# Altium PCB wifi_can.PcbDoc
Units mm, origin at the board's own origin, x right, y up, seen from the top; angles counter-clockwise.
Board outline 43 x 71 mm, 2 copper layers (Top Layer, Bottom Layer); 64 components, 43 nets, 263 pads, 182 vias.
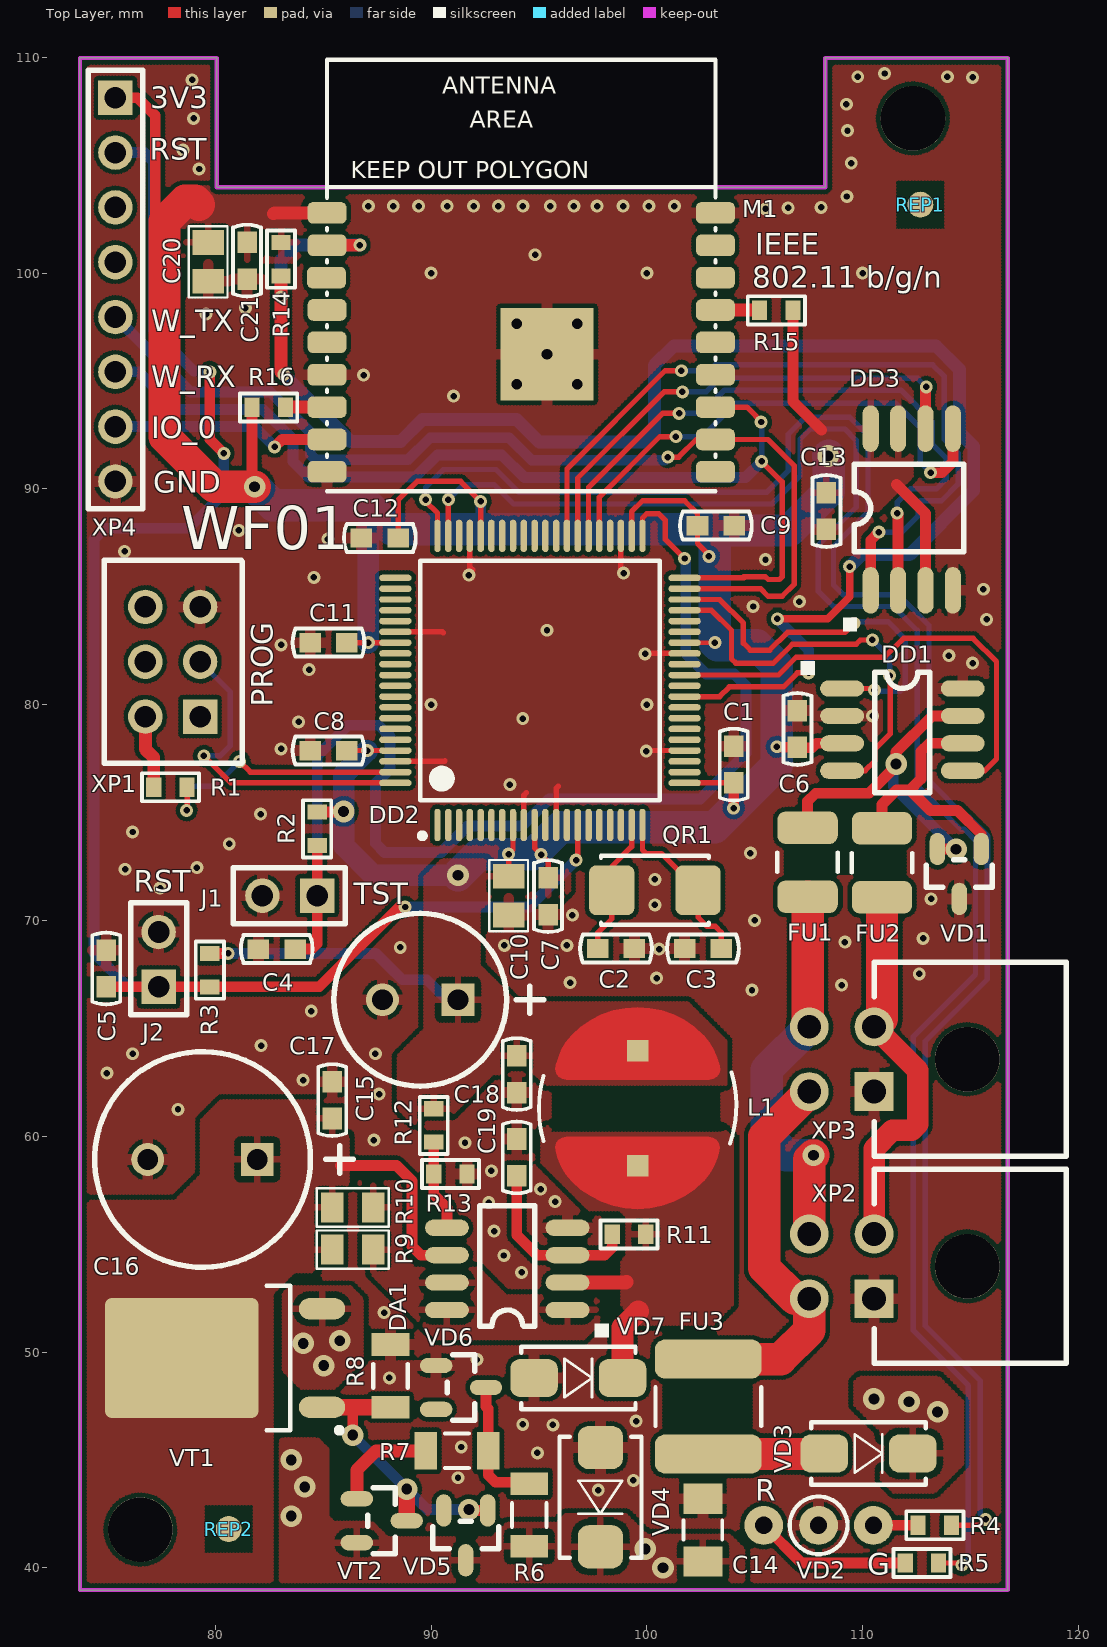
[diagram p0: Top Layer view]
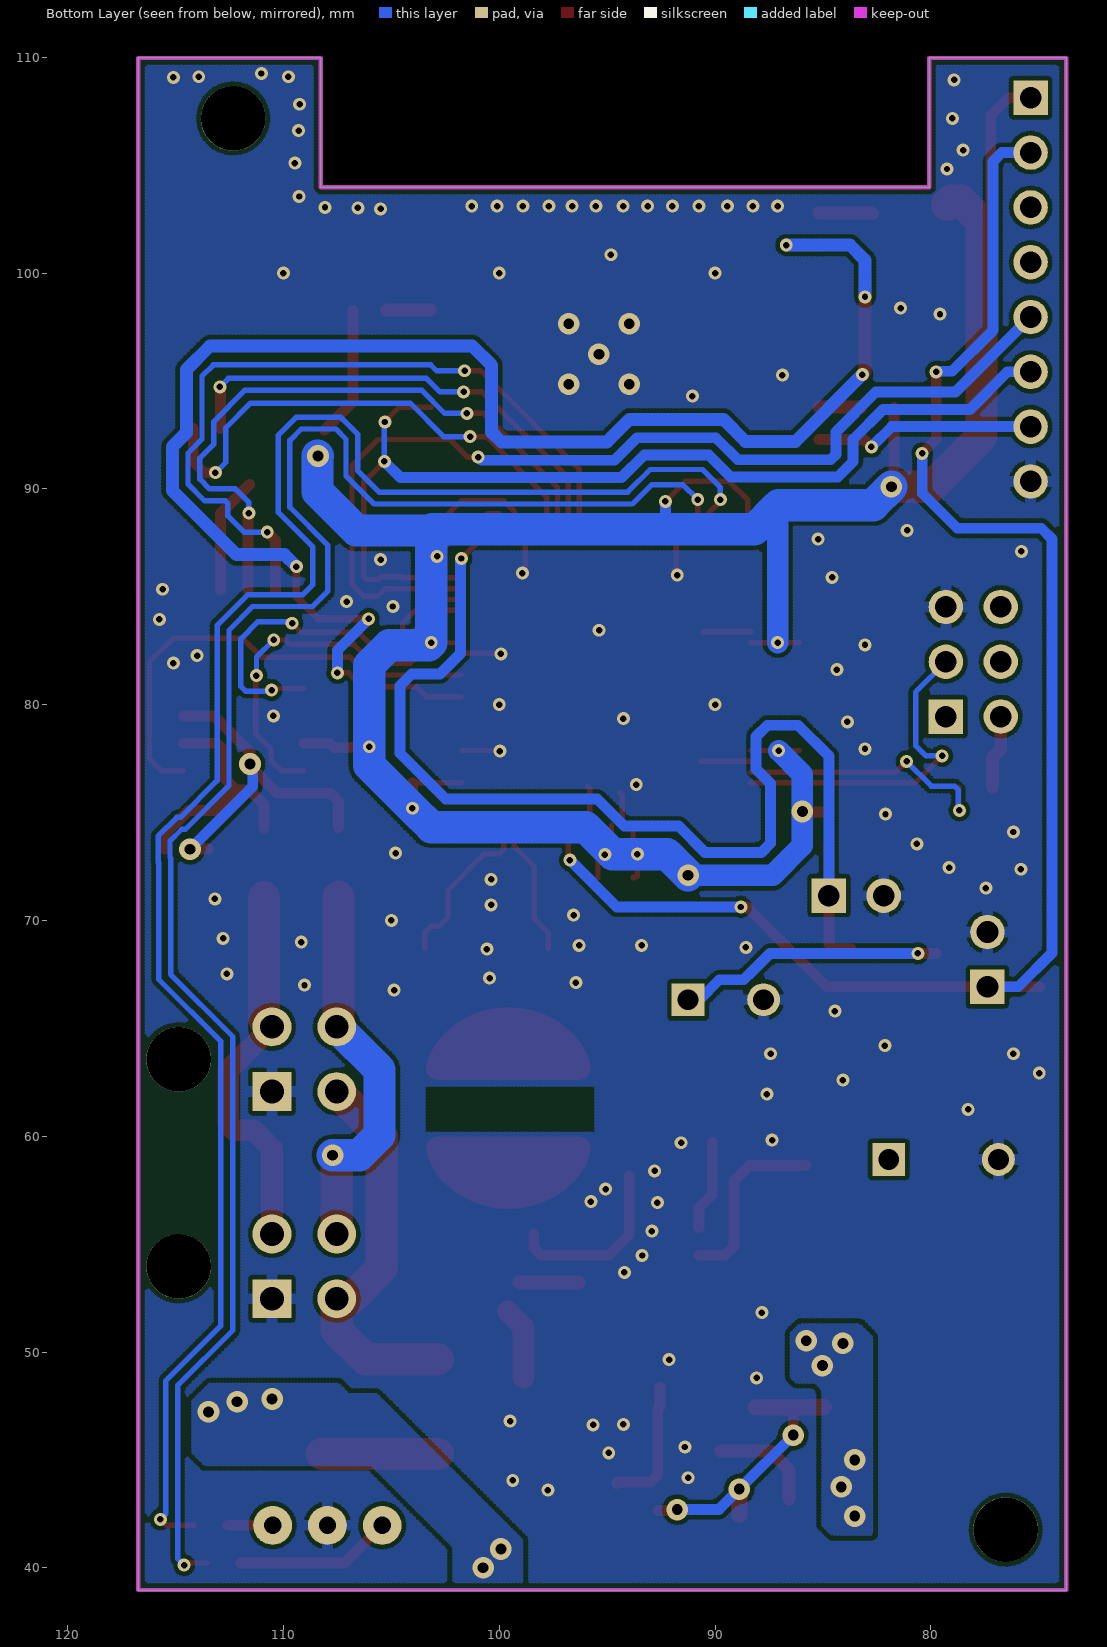
[diagram p1: Bottom Layer view, seen from below]

## Layer stack, top to bottom
Top Solder: solder mask 0.0102, Solder Resist, Dk 3.5
Top Layer: signal copper 0.0356
Dielectric 1: dielectric 0.32, FR-4, Dk 4.8
Bottom Layer: signal copper 0.0356
Bottom Solder: solder mask 0.0102, Solder Resist, Dk 3.5

## Board outline
73.731,38.971 73.731,109.971 80.075,109.971 80.075,103.975 108.275,103.975 108.275,109.971 116.731,109.971 116.731,38.971

## Design rules (kind name [scope] priority, off if disabled: settings)
Clearance Clearance_1 [InComponent('DD1')] p1: gap=0.2 ignorepadtopadclearanceinfootprint=FALSE
Clearance [All] p2: gap=0.2 ignorepadtopadclearanceinfootprint=FALSE
PolygonConnect PolygonConnect_1 [IsVia OR InComponent('VT1') AND InNet('VIN_F')] p1: connectstyle=Direct reliefconductorwidth=0.254 reliefentries=4 polygonreliefangle="90 Angle" airgapwidth=0.254
PolygonConnect PolygonConnect_2 [InComponent('XP2') AND InNet('GND') OR InComponent('XP3') OR InNet('GND')] p2: connectstyle=Relief reliefconductorwidth=0.5 reliefentries=4 polygonreliefangle="90 Angle" airgapwidth=0.2
PolygonConnect [All] p3: connectstyle=Relief reliefconductorwidth=0.3 reliefentries=4 polygonreliefangle="90 Angle" airgapwidth=0.3
RoutingVias [All] p1: holewidth=0.4 width=0.8 viastyle="Through Hole" minholewidth=0.3 minwidth=0.6 maxholewidth=0.5 maxwidth=1
SolderMaskExpansion [All] p1: expansion=0.102
Width [All] p1: maxlimit=3 minlimit=0.2 preferedwidth=0.5
30 further rules are at their usual default settings.

## Classes and differential pairs
component class WiFi: C20 C21 M1 R14 R15 R16
component class Power: C14 C15 C16 C17 C18 C19 DA1 FU3 L1 R6 R7 R8 R9 R10 R11 R12 R13 VD3 VD4 VD5 VD6 VD7 VT1 VT2
component class MCU: C2 C3 C4 C5 C6 C7 C8 C9 C10 C11 C12 C13 DD2 DD3 QR1 R2 R3 R4 R5 REP1 REP2 VD2
component class Connections: J1 J2 R1 XP1 XP2 XP3 XP4
component class CAN: C1 FU1 FU2 VD1

## Components (designator, comment, footprint, x,y, rotation, side; value= is the part's Value field where it differs from the comment)
C1 "0.1uF" CC0603 104.025,77.225 r270 top
C2 "22pF" CC0603 98.575,68.7 r180 top
C3 "22pF" CC0603 102.6,68.7 r0 top
C4 "220pF" CC0603 82.85,68.675 r0 top
C5 "220pF" CC0603 74.95,67.775 r270 top
C6 "0.1uF" CC0603 106.975,78.875 r270 top
C7 "0.1uF" CC0603 95.425,71.125 r90 top
C8 "0.1uF" CC0603 85.25,77.875 r0 top
C9 "0.1uF" CC0603 103.2,88.3 r180 top
C10 "4.7uF" CC0805 93.6,71.15 r90 top
C11 "0.1uF" CC0603 85.25,82.875 r0 top
C12 "0.1uF" CC0603 87.625,87.725 r0 top
C13 "0.1uF" CC0603 108.325,88.975 r90 top
C14 "0.1uF" CC1206 102.6,41.75 r270 top
C15 "0.1uF" CC0603 85.425,61.675 r270 top
C16 "470uFx35V" CC16X10_CAP0.5(1)(Primary) 81.95,58.925 r180 top
C17 "1000uFx6.3V" CC8X3.5 91.25,66.325 r180 top
C18 "0.1uF" CC0603 93.975,62.875 r90 top
C19 "220pF" CC0603 93.975,59.025 r270 top
C20 "10uF" CC0805 79.675,100.525 r90 top
C21 "0.1uF" CC0603 81.475,100.575 r90 top
DA1 "MC34063" SO-8 96.325,51.95 r90 top
DD1 "SN65HVD234D" SO-8 109.05,80.75 r270 top
DD2 "LPC1754FBD80" TQFP-80_0.5 95.05,81.125 r90 top
DD3 "M25PE16-VHW" EIAJ_SO8 110.375,85.3 r90 top
FU1 "MICROSMD010F-2" RC1210 107.45,72.7 r270 top
FU2 "MICROSMD010F-2" RC1210 110.9,72.675 r270 top
FU3 "MF-SMDF050" MF-SMDF 102.85,47.475 r270 top
J1 "PLS-02" PLS-02 84.725,71.15 r180 top
J2 "PLS-02" PLS-02 77.375,66.925 r90 top
L1 "220uH" SDR0805 99.575,61.3 r270 top
M1 "ESP WROOM-02" ESP-WOORM-02 85.181,102.791 r0 top
QR1 "NX5032GA-12.000MHz LN-CD-1" AC5032_2 100.375,71.4 r0 top
R1 "100E" RC0603 77.925,76.175 r180 top
R2 "10k" RC0603 84.725,74.25 r90 top
R3 "10k" RC0603 79.75,67.7 r270 top
R4 "200E" RC0603 113.35,41.975 r180 top
R5 "300E" RC0603 112.75,40.225 r0 top
R6 "220k" RC1206 94.55,42.45 r270 top
R7 "220k" RC1206 91.2,45.425 r180 top
R8 "220k" RC1206 88.125,48.9 r90 top
R9 "1E" RC0805 86.375,54.75 r180 top
R10 "1E" RC0805 86.375,56.7 r180 top
R11 "560k" RC0603 99.175,55.45 r180 top
R12 "18k 1%" RC0603 90.125,60.5 r270 top
R13 "11k 1%" RC0603 90.9,58.25 r180 top
R14 "10k" RC0603 83.05,100.65 r90 top
R15 "10k" RC0603 106,98.275 r0 top
R16 "10k" RC0603 82.475,93.775 r0 top
REP1 "REPER_POINT_1.2" REPER1.2 112.675,103.175 r90 top
REP2 "REPER_POINT_1.2" REPER1.2 80.625,41.8 r90 top
VD1 "PESD2CAN" SOT-23(123) 115.5,73.325 r90 top
VD2 "GNL3015UEUGW" GNL3015 107.95,41.94 r180 top
VD3 "GS1M" SMA 110.275,45.3 r0 top value={Value}
VD4 "SMBJ150A" SMB 97.85,43.275 r90 top
VD5 "BZX84C15" SOT-23(123) 92.625,42.675 r90 top value={Value}
VD6 "BZX84C39" SOT-23(123) 90.225,49.375 r180 top value={Value}
VD7 "SS14" SMA 96.825,48.8 r0 top
VT1 "FQD5P20TM" D-PAK(TO-252AA) 80.45,49.725 r180 top
VT2 "BC807-40" SOT-23(123) 86.55,43.2 r180 top
XP1 "PLD-06" PIN6 79.3,79.45 r90 top
XP2 "MIF2X02PRP" MIF2X02PRP 110.531,52.471 r0 top
XP3 "MIF2X02PRP" MIF2X02PRP 110.531,62.071 r0 top
XP4 "PLS-08" PLS-08 75.375,108.125 r270 top

## Footprints (in the part's own frame and the unit in brackets; to place one, negate y for a bottom-side part, rotate by r counter-clockwise, add the part's x,y. Pads: shape width x height; smd on the part's side, far side on the other; paste and mask are expansions set on the pad)
AC5032_2 [mm]
  rrect30% 2.1x2.3 smd mask+0.05: 1(-2,0) 2(2,0)
  silkscreen extent -2.5,-1.6 2.5,1.6
CC8X3.5 [mil]
  rect 60x60 hole 38 mask+1.97: 1(0,0)
  round 60 hole 38 mask+1.97: 2(137.8,0)
  silkscreen extent -156,-157 226,157
CC16X10_CAP0.5(1)(Primary) [mil]
  round 60 hole 38 mask+1.97: 1(200,0)
  rect 60x60 hole 38 mask+1.97: 2(0,0)
  silkscreen extent -175,-197 297,197
CC0603 [mm]
  rect 1x0.9 smd paste-25.4 mask+0.05: 1(-0.85,0) 2(0.85,0)
  silkscreen extent -1.66,-0.65 1.66,0.65
CC0805 [mm]
  rect 1.15x1.45 smd paste-25.4 mask+0.05: 1(-0.9,0) 2(0.9,0)
  silkscreen extent -1.65,-0.9 1.65,0.9
CC1206 [mm]
  rect 1.4x1.8 smd paste-25.4 mask+0.05: 1(-1.45,0) 2(1.45,0)
  silkscreen extent -0.45,-0.9 0.45,0.9
D-PAK(TO-252AA) [mm]
  oval 2.15x1 smd mask+0.05: 1(-4.5,2.28) 3(-4.5,-2.28)
  rrect10% 7.1x5.55 smd mask+0.05: 2(2,0)
  silkscreen extent -5.42,-3.35 -1.92,3.47
EIAJ_SO8 [mil]
  oval 85x29.53 smd mask+1.97: 1(0,0) 2(0,-50) 3(0,-100) 4(0,-150) 5(295,-150) 6(295,-100) 7(295,-50) 8(295,0)
  silkscreen extent -75,-170 230,50
ESP-WOORM-02 [mm]
  rrect50% 1.8x1 smd mask+0.05: 1(0,0) 2(0,-1.5) 3(-0.025,-3) 4(0,-4.5) 5(0,-6) 6(0,-7.5) 7(0,-9) 8(0,-10.5) 9(0,-12) 10(18,-12) 11(18,-10.5) 12(18,-9) 13(18,-7.5) 14(18,-6) 15(18,-4.5) 16(18,-3) 17(18,-1.5) 18(18,0)
  rect 4.3x4.3 smd mask+0.05: 19(10.2,-6.55)
  silkscreen extent 0,-12.9 18,7.1
GNL3015 [mm]
  round 1.8 hole 0.8 mask+0.05: 1(-2.55,-0.03) 2(-0.01,-0.03) 3(2.53,-0.03)
  silkscreen extent -1.35,-1.36 1.33,1.3
MF-SMDF [mm]
  rrect50% 1.8x4.95 smd mask+0.05: 1(-2.2,0) 2(2.2,0)
  silkscreen extent -0.9,-2.45 0.9,2.45
MIF2X02PRP [mm]
  rect 1.8x1.8 hole 1.1 mask+0.05: 1(0,0)
  round 1.8 hole 1.1 mask+0.05: 2(0,3) 3(-3,0) 4(-3,3)
  round 3 hole 3 unplated mask+0.05: 5(4.32,1.5)
  silkscreen extent 0,-3 8.9,6
PIN6 [mm]
  rect 1.6x1.6 hole 1 mask+0.05: 1(0,0)
  round 1.6 hole 1 mask+0.05: 2(0,2.54) 3(2.54,0) 4(2.54,2.54) 5(5.08,0) 6(5.08,2.54)
  silkscreen extent -2.16,-1.96 7.24,4.45
PLS-02 [mm]
  rect 1.6x1.6 hole 1 mask+0.05: 1(0,0)
  round 1.6 hole 1 mask+0.05: 2(2.54,0)
  silkscreen extent -1.3,-1.3 3.9,1.3
PLS-08 [mm]
  rect 1.6x1.6 hole 1 mask+0.05: 1(0,0)
  round 1.6 hole 1 mask+0.05: 2(2.54,0) 3(5.08,0) 4(7.62,0) 5(10.16,0) 6(12.7,0) 7(15.24,0) 8(17.78,0)
  silkscreen extent -1.27,-1.27 19.05,1.27
RC0603 [mm]
  rect 0.7x0.9 smd paste-25.4 mask+0.05: 1(-0.775,0) 2(0.774,0)
  silkscreen extent -1.32,-0.65 1.33,0.65
RC0805 [mm]
  rect 1.05x1.4 smd paste-25.4 mask+0.05: 1(-0.95,0) 2(0.95,0)
  silkscreen extent -1.67,-0.89 1.67,0.89
RC1206 [mm]
  rect 1.05x1.75 smd paste-25.4 mask+0.05: 1(-1.45,0) 2(1.45,0)
  silkscreen extent -0.55,-0.8 0.55,0.8
RC1210 [mm]
  rrect50% 1.5x2.8 smd mask+0.05: 1(-1.6,0) 2(1.6,0)
  silkscreen extent -0.45,-1.4 0.45,1.4
REPER1.2 [mm]
  round 1.2 smd paste-25.4 mask+0.05: 1(0,0)
  Top Layer pour cut-out: -1.2,-1.2 1.2,-1.2 1.2,1.2 -1.2,1.2
SDR0805 [mm]
  rect 1x1 smd paste-25.4 mask+0.05: 1(-2.667,0) 2(2.667,0)
  Top Layer region: -1.327,3.319 -1.362,3.503 -1.461,3.66 -1.612,3.771 -1.792,3.818 -1.977,3.797 -2.318,3.69 -2.706,3.535 -3.065,3.321 -3.387,3.053 -3.392,3.047 -3.771,2.627 -4.09,2.16 -4.345,1.654 -4.53,1.119 -4.642,0.565 -4.68,0 -4.642,-0.565 -4.53,-1.119 -4.345,-1.654 -4.09,-2.16 -3.771,-2.627 -3.392,-3.047 -3.381,-3.059 -3.063,-3.323 -2.709,-3.534 -2.325,-3.688 -1.996,-3.791 -1.806,-3.813 -1.62,-3.764 -1.465,-3.65 -1.363,-3.488 -1.327,-3.299
  Top Layer region: 1.327,-3.319 1.362,-3.503 1.461,-3.66 1.612,-3.771 1.792,-3.818 1.977,-3.797 2.318,-3.69 2.706,-3.535 3.065,-3.321 3.387,-3.053 3.392,-3.047 3.771,-2.627 4.09,-2.16 4.345,-1.654 4.53,-1.119 4.642,-0.565 4.68,0 4.642,0.565 4.53,1.119 4.345,1.654 4.09,2.16 3.771,2.627 3.392,3.047 3.381,3.059 3.063,3.323 2.709,3.534 2.325,3.688 1.996,3.791 1.806,3.813 1.62,3.764 1.465,3.65 1.363,3.488 1.327,3.299
  silkscreen extent -1.66,-4.57 1.64,4.57
SMA [mm]
  rrect50% 2.2x1.75 smd mask+0.05: 1(-2.05,0) 2(2.05,0)
  silkscreen extent -2.65,-1.45 2.65,1.45
SMB [mm]
  rrect50% 2x2.1 smd mask+0.05: 1(2.3,0) 2(-2.3,0)
  silkscreen extent -2.8,-1.9 2.8,1.9
SO-8 [mil]
  oval 29.53x80 smd mask+1.97: 1(0,0) 2(50,0) 3(100,0) 4(150,0) 5(150,220) 6(100,220) 7(50,220) 8(0,220)
  silkscreen extent -50,-75 190,160
SOT-23(123) [mil]
  oval 59.06x28.07 smd mask+1.97: 1(-0.5,0) 2(-0.5,80) 3(-91.5,40)
  silkscreen extent -70,-20 -21,100
TQFP-80_0.5 [mm]
  oval 1.5x0.3 smd mask+0.05: 1(-6.7,4.75) 2(-6.7,4.25) 3(-6.7,3.75) 4(-6.7,3.25) 5(-6.7,2.75) 6(-6.7,2.25) 7(-6.7,1.75) 8(-6.7,1.25) 9(-6.7,0.75) 10(-6.7,0.25) 11(-6.7,-0.25) 12(-6.7,-0.75) 13(-6.7,-1.25) 14(-6.7,-1.75) 15(-6.7,-2.25) 16(-6.7,-2.75) 17(-6.7,-3.25) 18(-6.7,-3.75) 19(-6.7,-4.25) 20(-6.7,-4.75) 41(6.7,-4.75) 42(6.7,-4.25) 43(6.7,-3.75) 44(6.7,-3.25) 45(6.7,-2.75) 46(6.7,-2.25) 47(6.7,-1.75) 48(6.7,-1.25) 49(6.7,-0.75) 50(6.7,-0.25) 51(6.7,0.25) 52(6.7,0.75) 53(6.7,1.25) 54(6.7,1.75) 55(6.7,2.25) 56(6.7,2.75) 57(6.7,3.25) 58(6.7,3.75) 59(6.7,4.25) 60(6.7,4.75)
  oval 0.3x1.5 smd mask+0.05: 21(-4.75,-6.7) 22(-4.25,-6.7) 23(-3.75,-6.7) 24(-3.25,-6.7) 25(-2.75,-6.7) 26(-2.25,-6.7) 27(-1.75,-6.7) 28(-1.25,-6.7) 29(-0.75,-6.7) 30(-0.25,-6.7) 31(0.25,-6.7) 32(0.75,-6.7) 33(1.25,-6.7) 34(1.75,-6.7) 35(2.25,-6.7) 36(2.75,-6.7) 37(3.25,-6.7) 38(3.75,-6.7) 39(4.25,-6.7) 40(4.75,-6.7) 61(4.75,6.7) 62(4.25,6.7) 63(3.75,6.7) 64(3.25,6.7) 65(2.75,6.7) 66(2.25,6.7) 67(1.75,6.7) 68(1.25,6.7) 69(0.75,6.7) 70(0.25,6.7) 71(-0.25,6.7) 72(-0.75,6.7) 73(-1.25,6.7) 74(-1.75,6.7) 75(-2.25,6.7) 76(-2.75,6.7) 77(-3.25,6.7) 78(-3.75,6.7) 79(-4.25,6.7) 80(-4.75,6.7)
  silkscreen extent -7.32,-5.55 5.55,5.57

## Part data
C1 C2 C3 C4 C5 C6 C7 C8 C9 C11 C12 C13 C15 C18 C19 C21: library part CC0603, "CC0603"
C10 C20: library part CC0805, "CC0805"
C14: library part CC1206, "CC1206"
C16: library part CAP0.5(1), "CAP0.5(1)"
C17: library part CAP0.35, "CAP0.35"
DD1: "CAN Transceiver"
DD2: "Cortex -M3 32-Bit Microcontroller, 128KB Flash, 64KB RAM, 800-Lead LQFP", ComponentLink1Description="Manufacturer Link", ComponentLink1URL=http://www.nxp.com/
DD3: library part S25FL016A0LMFI01, "S25FL016A0LMFI01"
FU1 FU2: library part MICROSMD, "MICROSMD"
FU3: library part MF-SMDF, "MF-SMDF"
L1: library part SDR0805, "SDR0805"
M1: library part ESP-WROOM-02
QR1: library part AC5032_2, "AC5032/2"
R1 R2 R3 R4 R5 R11 R12 R13 R14 R15 R16: library part RC0603, "RC0603"
R6 R7 R8: library part RC1206, "RC1206"
R9 R10: library part RC0805, "RC0805"
REP1 REP2: library part REPER1.2, "REPER1.2"
VD1: "TVS for CAN"
VD2: library part GNL3015-UEUGW
VD4: library part SMBJ, "SMBJ"
VD5 VD6: library part BZX84, "Zener Voltage Regulator Diode"
VD7: "Schottky Rectifier", ComponentField6="Published 8-Jun-2000, Modified 10-July-2000: SIM Model Added.", OriginalName=10BQ100
VT1: library part IRFR9220, "HEXFET Power MOSFET", ComponentField7="Published 8-Jun-2000", OriginalName=IRLML5103
VT2: library part BC857B, "BC857B", ComponentField7="Published 29-Sep-2000", OriginalName=BC846BLT1
XP1: "PLD06"

## Free pads (board coordinates)
  round 3 hole 3 mask+0.05: 0(76.531,41.771) 0(112.331,107.171)

## Via types
v1: diameter 0.6, hole 0.3, Top Layer to Bottom Layer, 156 vias
v2: diameter 1, hole 0.5, Top Layer to Bottom Layer, 26 vias

## Nets (pads, with @x,y where several pads share a name; then routed paths per layer and width w, separated by ;. In a path a pad name is that pad's centre, name@x,y a point inside that pad or via, vN(x,y) a via of type N, cw(c..) or ccw(c..) an arc to the next point about the centre after c; other vN are vias at no path point)
+3V3: C1.2 C6.2 C7.2 C8.2 C9.2 C10.2 C11.2 C12.2 C13.2 C17.1 C18.2 C20.2 C21.2 DD1.3 DD2.8 DD2.10 DD2.21 DD2.34 DD2.42 DD2.56 DD2.67 DD2.77 DD3.3 DD3.7 DD3.8 L1.1 M1.1 R2.2 R3.1 R12.1 R14.2 R15.2 R16.1 XP4.1 | length 167.3
  Top Layer w0.2: DD2.34 v1(103.15,82.875)
  Top Layer w0.25: C8.2 v1(87.05,77.875) DD2.77 ; C11.2 v1(87.1,82.875) DD2.67 ; C12.2 88.475,89.475 89.35,90.35 91.375,90.35 v1(92.3,89.425) DD2.56 ; C10.2 v1(93.6,73.075) 93.8,73.275 DD2.8 ; C10.2@93.775,71.975 C10.2@93.8,72 ; DD2.10 94.8,73.35 95.425,72.725 C7.2 ; DD2.42 99.3,88.95 99.8,89.45 101.75,89.45 102.35,88.85 C9.2 102.35,87.475 102.95,86.875 v1(102.875,86.875) ; DD2.21 C1.2
  Top Layer w0.5: XP4.1 76.4,108.125 77.225,107.3 77.225,102.45 77.65,102.025 ; R3.1 v1(80.6,68.475) ; R16.1 81.7,90.225 v2(81.825,90.1) ; R2.2 85.924,75.024 v2(85.95,75.05) ; v1(104.025,75.2) C1.2 ; v1(106.025,78.05) 106.05,78.025 C6.2 107,78 107.65,78 107.86,78.21 DD1.3 ; R15.2 106.774,94.051 108.1,92.725 ; 111.575,90.2 112.915,88.86 DD3.3
  Top Layer w0.6: 82.7,102.75 82.741,102.791 M1.1 M1.1@85.173,102.799
  Top Layer w1.5: 79.249,103.174 79.074,103.35 78.6,103.35 77.65,102.4 77.65,102.025 77.65,92.425 79.975,90.1 v2(81.825,90.1)
  Bottom Layer w0.5: v1(80.6,68.475) 87.45,68.475 88.288,67.637 88.293,67.637 88.68,67.25 89.8,67.25 90.725,66.325 C17.1 ; 91.625,88.125 92.3,88.8 v1(92.3,89.425)
  Bottom Layer w1: v1(87.05,77.875) 85.95,76.775 v2(85.95,75.05) 85.95,73.475 87.325,72.1 v2(91.25,72.1) ; 87.05,89.25 87.1,89.2 v1(87.1,82.875)
  Bottom Layer w1.5: v2(81.825,90.1) 82.675,89.25 87.05,89.25 ; 87.1,89.2 88.175,88.125 91.625,88.125 103.1,88.125 103.15,88.075 ; v2(91.25,72.1) 92.225,73.075 v1(93.6,73.075) 94.75,73.075 96,74.325 103.15,74.325 v1(104.025,75.2) 106.025,77.2 v1(106.025,78.05) 106.025,81.825 105.1,82.75 103.275,82.75 v1(103.15,82.875) 103.15,88.075 ; v2(108.4,91.525) 108.425,91.55 108.425,89.875 106.625,88.075 103.15,88.075
  other v1: 95.1,73.05
CAN_D: DD1.1 DD2.38 | length 17.9
  Top Layer w0.25: DD2.38 103.375,84.875 104.475,83.775 104.475,82.85 104.8,82.525 105.694,82.525 106.519,83.35 109.175,83.35 v1(109.6,83.775) ; DD1.1 110.475,80.75 v1(110.55,80.675)
  Bottom Layer w0.25: v1(109.6,83.775) 109.675,83.85 111.175,83.85 111.975,83.05 111.975,80.85 111.75,80.625 110.6,80.625 v1(110.55,80.675)
CAN_EN: DD1.5 DD2.31 | length 21.9
  Top Layer w0.25: DD2.31 106.1,81.375 106.925,82.2 111.025,82.2 111.9,83.075 115.125,83.075 116.206,81.994 116.206,77.481 115.665,76.94 DD1.5
CAN_R: DD1.4 DD2.37 | length 18.9
  Top Layer w0.25: DD2.37 103,84.375 103.925,83.45 103.925,82.125 104.125,81.925 105.872,81.925 106.747,82.8 109.7,82.8 109.9,83 v1(110.45,83) ; DD1.4 110.115,76.94 110.575,77.4 110.575,77.95 111.275,78.65 111.275,81.325 v1(111.25,81.35)
  Bottom Layer w0.25: v1(110.45,83) 111.25,82.2 v1(111.25,81.35)
CH_EN: DD2.29 M1.2 R14.1 | length 77
  Top Layer w0.25: DD2.29 103.375,80.375 103.825,80.825 106.328,80.825 106.978,81.475 v1(107.5,81.475)
  Top Layer w0.35: v1(106.05,83.975) 108.375,83.975 109.4,85 v1(109.4,86.4)
  Top Layer w0.6: R14.1 v1(83.05,98.9) 83.05,95.425 v1(83.175,95.3) ; M1.2 86.691,101.291 v1(86.7,101.3)
  Bottom Layer w0.5: v1(106.05,83.975) 107.5,82.525 v1(107.5,81.475) v1@107.475,81.5
  Bottom Layer w0.6: v1(83.05,98.9) 83.05,100.6 83.75,101.3 v1(86.7,101.3) ; v1(83.175,95.3) 86.275,92.2 88.587,92.2 89.612,93.225 93.966,93.225 95.016,92.175 99.9,92.175 100.35,92.625 100.35,95.725 101.25,96.625 113.4,96.625 114.5,95.525 114.5,92.603 115.15,91.953 115.15,89.922 112.178,86.95 109.95,86.95 v1(109.4,86.4)
GND: C1.1 C2.1 C3.1 C4.1 C5.1 C6.1 C7.1 C8.1 C9.1 C10.1 C11.1 C12.1 C13.1 C14.1 C15.1 C16.1 C17.2 C18.1 C19.1 C20.1 C21.1 DA1.4 DD1.2 DD1.8 DD2.9 DD2.12 DD2.24 DD2.33 DD2.43 DD2.57 DD2.66 DD2.78 DD3.4 J1.2 J2.2 M1.6 M1.9 M1.13 M1.18 M1.19 R8.2 R13.1 VD1.3 VD2.2 VD4.1 VD6.1 VD7.1 XP1.5 XP2.1 XP3.1 XP4.8 | length 15
  Top Layer w0.25: DD2.78 90.625,77.375 90.65,77.4 ; DD2.66 90.525,83.375 90.575,83.325 ; DD2.57 91.8,86.375 91.925,86.25 ; DD2.9 94.3,75.8 94.425,75.925 ; DD2.12 95.8,76.125 95.9,76.225 ; DD2.43 98.8,86.225 v1(98.925,86.1) ; v1(99.925,82.35) 99.95,82.375 DD2.33 ; v1(99.975,77.85) 100,77.875 DD2.24
  other v1: 97.75,43.6 99.375,44.05 91.25,44.175 94.925,45.325 91.4,45.6 95.65,46.625 94.25,46.65 99.5,46.8 88.075,48.8 92.125,49.65 87.825,51.825 94.2,53.69 93.375,54.475 92.925,55.6 92.675,56.925 95.75,56.975 95.075,57.55 92.8,58.4 91.575,59.7 87.35,59.825 78.275,61.25 87.6,61.95 84.075,62.6 74.975,62.925 76.175,63.825 87.425,63.825 82.125,64.2 84.45,65.8 104.875,66.775 109.025,67 96.45,67.125 100.45,67.325 112.625,67.525 100.575,68.675 88.575,68.75 93.4,68.85 96.3,68.85 109.175,69 112.8,69.175 105,70 96.55,70.25 100.375,70.725 113.175,71 77.45,71.5 100.375,71.9 75.825,72.375 79.153,72.45 104.8,73.125 80.65,73.55 76.175,74.1 82.1,74.925 93.65,76.3 83.05,77.95 83.864,79.2 94.25,79.35 110.466,79.48 90,80 100,80 84.35,81.625 115.1,81.925 114,82.275 83.05,82.775 95.375,83.45 115.75,83.95 104.925,84.55 107.075,84.775 115.596,85.35 84.575,85.9 91.75,86 105.5,86.725 75.8,87.1 85.225,87.675 81.1,88.075 91.05,94.3 86.875,95.275 79.575,98.1 81.4,98.375 90,100 100,100 110,100 94.825,100.85 105.5,102.975 106.55,103.025 108.075,103.05 87.1,103.1 88.25,103.1 89.425,103.1 90.75,103.1 91.975,103.1 93.125,103.1 94.256,103.1 95.525,103.1 96.625,103.1 97.7,103.1 98.9,103.1 100.1,103.1 101.275,103.1 109.275,103.55 79.25,104.825 109.475,105.1 78.5,105.7 109.3,106.6 79,107.175 109.25,107.825 78.925,108.95 115.1,109.075 109.775,109.1 113.925,109.1 111.025,109.25
  other v2: 93.975,94.85 96.775,94.85 95.381,96.241 93.975,97.65 96.775,97.65
GREEN: DD2.60 DD2.73 R4.1 | length 86.4
  Top Layer w0.25: v1@89.675,89.5 89.675,89.65 89.75,89.575 v1(89.75,89.5) 89.75,89.425 90.3,88.875 DD2.60 ; R4.1 115.425,41.975 v1(115.7,42.25)
  Bottom Layer w0.25: v1(89.75,89.5) 89.75,90.075 90.575,90.9 93.003,90.9 94.053,89.85 105.572,89.85 106.55,90.828 106.55,92.528 107.347,93.325 109.403,93.325 110.25,92.478 110.25,88.922 108.65,87.322 108.65,85.55 109.1,85.1 111.653,85.1 113.075,83.678 113.075,76.478 114.774,74.779 114.942,74.779 115.806,73.915 115.806,72.693 115.78,72.667 115.78,67.277 112.9,64.397 112.9,51.228 115.45,48.678 115.45,42.5 v1(115.7,42.25)
MISO: DD2.46 DD3.2 | length 30.4
  Top Layer w0.25: DD2.46 97.3,90.075 100.725,93.5 v1(101.5,93.5)
  Top Layer w0.5: v1(111.6,88.875) 111.645,88.83 DD3.2
  Bottom Layer w0.25: v1(101.5,93.5) 102.525,93.5 103.6,94.575 111.775,94.575 113.225,93.125 113.225,92.075 113.875,91.425 113.875,90.45 113.425,90 112.225,90 111.6,89.375 v1(111.6,88.875)
MOSI: DD2.45 DD3.5 | length 24
  Top Layer w0.25: DD2.45 97.8,89.625 100.6,92.425 v1(101.35,92.425)
  Top Layer w0.5: v1(113.15,90.75) 113.675,90.75 114.185,91.26 DD3.5
  Bottom Layer w0.25: v1(101.35,92.425) 102.575,92.425 104.125,93.975 111.525,93.975 112.675,92.825 112.675,91.225 v1(113.15,90.75)
NetC2_2: C2.2 DD2.19 QR1.1 | length 6.4
  Top Layer w0.25: C2.2 97.725,69.425 98.375,70.075 QR1.1 98.375,72.5 99.3,73.425 DD2.19
NetC3_2: C3.2 DD2.20 QR1.2 | length 7.9
  Top Layer w0.25: DD2.20 99.8,73.275 99.975,73.1 100.675,73.1 QR1.2 102.375,70.15 102.8,69.725 103.175,69.725 103.45,69.45 C3.2
NetC5_2: C5.2 DD2.14 J2.1 R3.2 XP4.2 | length 74.6
  Top Layer w0.25: v1(96.725,72.8) 96.8,72.875 DD2.14
  Top Layer w0.5: C5.2 J2.1 79.749,66.925 84.826,66.926 88.525,70.625 v1(88.8,70.625) ; v1(79.75,95.425) 79.75,92.3 v1(80.4,91.65)
  Bottom Layer w0.5: XP4.2 76.715,105.585 77.125,105.175 77.125,97.346 79.021,95.45 v1@79.725,95.45 ; J2.1 75.95,66.925 74.381,68.494 74.381,87.675 74.881,88.175 78.775,88.175 80.4,89.8 v1(80.4,91.65) ; v1(88.8,70.625) 94.55,70.625 v1(96.725,72.8)
NetC14_2: C14.2 R6.2 VD3.2 VD4.2 VD5.3 VT1.3 VT2.2
  other v2: 100.75,40 99.925,40.875 83.525,42.4 84.15,43.75 83.525,45 113.475,47.225 112.15,47.7 110.525,47.825 85.025,49.375 84.075,50.4 85.775,50.525
NetC19_2: C19.2 DA1.3 R11.2 | length 8.3
  Top Layer w0.5: C19.2 93.975,55.425 94.91,54.49 DA1.3 98.04,54.49 98.401,54.851 R11.2
NetDA1_1: DA1.1 DA1.7 DA1.8 R9.1 R10.1
NetDA1_2: DA1.2 L1.2 R11.1 VD7.2 | length 6.1
  Top Layer w0.65: DA1.2 99.02,53.22 99.05,53.25
  Top Layer w1: VD7.2 98.875,51.157 99.6,51.882
NetDA1_5: DA1.5 R12.2 R13.2 | length 4.2
  Top Layer w0.5: R12.2@90.126,59.725 R13.2 90.126,57.299 90.737,56.688 DA1.5
NetDD1_6: DD1.6 FU2.1 VD1.1 | length 11.6
  Top Layer w0.5: FU2.1 110.9,75.375 111.575,76.05 112.2,76.05 ; DD1.6 113.085,78.21 112.7,77.825 112.7,76.55 112.2,76.05 ; VD1.1 115.5,74 114.4,75.1 113.15,75.1 112.2,76.05
NetDD1_7: DD1.7 FU1.1 VD1.2 | length 16.6
  Top Layer w0.5: FU1.1 107.45,75.525 107.825,75.9 110.294,75.9 v2@111.597,77.203 ; v2@111.55,77.6 111.55,77.806 113.224,79.48 DD1.7 ; VD1.2 114.322,73.312 v2(114.331,73.304)
  Bottom Layer w0.5: v2(111.55,77.25) 111.55,77.35 111.425,77.475 111.425,76.209 v2(114.331,73.304)
NetFU1_2: FU1.2 XP2.4 XP3.4 | length 18.2
  Top Layer w1.5: FU1.2 107.45,65.152 XP3.4 ; XP2.4 107.531,58.931 v2(107.725,59.125)
  Bottom Layer w1.5: XP3.4 105.55,63.09 105.55,60.05 106.475,59.125 v2(107.725,59.125)
NetFU2_2: DD2.3 FU2.2 XP2.2 XP3.2 | length 18
  Top Layer w1: XP2.2 110.531,59.431 111.375,60.275 112.275,60.275 112.551,60.551 112.551,63.051 XP3.2
  Top Layer w1.5: XP3.2 110.9,65.44 FU2.2
NetFU3_2: DD2.5 FU3.2 VD3.1 | length 5.4
  Top Layer w1.5: FU3.2 108.2,45.275 VD3.1
NetM1_7: M1.7 R16.2 | length 1.9
  Top Layer w0.6: R16.2 83.265,93.791 M1.7
NetM1_8: M1.8 XP4.7 | length 10.3
  Top Layer w0.5: v1(82.75,91.95) 83.091,92.291 M1.8
  Bottom Layer w0.5: XP4.7 81.815,92.885 v1(82.75,91.95)
NetM1_15: M1.15 R15.1 | length 2.1
  Top Layer w0.6: M1.15 105.209,98.291 R15.1
NetR1_2: R1.2 XP1.2 | length 3.4
  Top Layer w0.6: XP1.2 76.76,77.94 77.151,77.549 R1.2
NetR4_2: R4.2 VD2.1 | length 2.1
  Top Layer w0.5: VD2.1 112.571,41.97 R4.2
NetR5_1: R5.1 VD2.3 | length 7.3
  Top Layer w0.5: VD2.3 107.165,40.225 R5.1
NetR6_1: R6.1 R7.1 VD6.3 | length 6.2
  Top Layer w0.5: VD6.3 92.549,47.476 92.65,47.375 R7.1 92.65,44.3 92.988,43.962 94.55,43.962 R6.1
NetR7_2: R7.2 VT2.1 | length 4.9
  Top Layer w0.6: VT2.1 86.563,44.538 87.45,45.425 R7.2
NetR8_1: R8.1 VD5.1 VT1.1 VT2.3 | length 13.4
  Top Layer w0.5: 86.35,47.445 86.375,47.42 v2(86.375,46.15) ; v2(91.754,42.702) 91.794,42.662 VD5.1
  Top Layer w0.75: VT1.1 86.35,47.445 88.12,47.445 R8.1 ; VT2.3@88.874,42.45 v2(88.875,43.65) v2(88.875,43.65)
  Bottom Layer w0.5: v2(86.375,46.15) 86.375,46.125 86.4,46.125 v2(88.875,43.65) 89.823,42.702 v2(91.754,42.702)
NetXP4_3: XP4.3
NetXP4_4: XP4.4
RED: DD2.59 R5.2 | length 85
  Top Layer w0.25: DD2.59 v1(90.8,89.5) ; R5.2 114.5,40.225 v1(114.6,40.125)
  Bottom Layer w0.25: v1(90.8,89.5) 91.5,90.2 92.925,90.2 93.825,89.3 105.8,89.3 107.1,90.6 107.1,92.3 107.575,92.775 109.175,92.775 109.7,92.25 109.7,89.15 107.95,87.4 107.95,85.25 108.65,84.55 111.425,84.55 112.525,83.45 112.525,76.25 114.546,74.229 114.714,74.229 115.256,73.687 115.256,72.92 115.23,72.895 115.23,67.505 112.35,64.625 112.35,51 114.9,48.45 114.9,40.425 v1(114.6,40.125)
RXD0: DD2.80 XP1.3 | length 15.3
  Top Layer w0.25: v1(79.475,77.625) 80.725,76.375 DD2.80
  Bottom Layer w0.25: XP1.3 80.7,80.59 80.7,78.1 80.225,77.625 v1(79.475,77.625)
RXD_WiFi: DD2.40 M1.12 XP4.6 | length 48.1
  Top Layer w0.25: DD2.40 104.5,85.875 104.55,85.925 ; M1.12 104.634,93.791 105.075,93.35 ; 104.5,85.925 104.55,85.925 ; v1(105.325,91.275) 106.275,90.325 106.275,85.925 106.15,85.8 105.628,85.8 105.503,85.925 104.55,85.925
  Bottom Layer w0.25: v1(105.3,93.1) 105.325,93.075 v1(105.325,91.275)
  Bottom Layer w0.5: XP4.6 76.45,95.425 78.19,93.685 82.217,93.685 83.6,92.302 83.6,91.268 84.318,90.55 89.27,90.55 90.295,91.575 93.282,91.575 94.332,90.525 104.575,90.525 v1(105.325,91.275)
SCK: DD2.47 DD3.6 | length 22.9
  Top Layer w0.25: DD2.47 96.8,90.5 100.8,94.5 v1(101.65,94.5)
  Top Layer w0.5: DD3.6 112.915,94.69 v1(112.95,94.725)
  Bottom Layer w0.25: v1(101.65,94.5) 102.747,94.5 103.372,95.125 112.55,95.125 v1(112.95,94.725)
SS0: DD2.48 DD3.1 | length 35.9
  Top Layer w0.25: DD2.48 96.3,90.925 100.85,95.475 v1(101.6,95.475)
  Top Layer w0.5: DD3.1 110.375,87.625 v1(110.75,88)
  Bottom Layer w0.25: v1(101.6,95.475) 102.9,95.475 103.175,95.75 113.25,95.75 113.775,95.225 113.775,92.303 114.425,91.653 114.425,90.222 113.653,89.45 112.7,89.45 112.575,89.325 112.575,88.75 111.825,88 v1(110.75,88)
TST: C4.2 DD2.41 J1.1 R2.1 | length 56
  Top Layer w0.25: DD2.41 99.8,88.65 100,88.85 100.55,88.85 100.85,88.55 100.85,87.675 v1(101.75,86.775) v1@101.675,86.7
  Top Layer w0.5: C4.2 84.475,68.675 84.725,68.925 J1.1 R2.1
  Bottom Layer w0.5: J1.1 84.725,77.625 86.15,79.05 87.575,79.05 88.1,78.525 88.1,77.025 87.425,76.35 87.425,73.575 87.85,73.15 90.462,73.15 91.687,74.375 94.212,74.375 95.462,75.625 102.475,75.625 104.6,77.75 104.6,80.875 104.05,81.425 102.75,81.425 101.8,82.375 v1@101.8,86.7
TXD_0: DD2.79 R1.1 | length 12.4
  Top Layer w0.25: v1(78.675,75.1) 78.7,75.125 R1.1 ; v1(81.125,77.375) 81.625,76.875 DD2.79
  Bottom Layer w0.25: v1(78.675,75.1) 78.725,75.15 78.725,76.05 78.9,76.225 79.975,76.225 v1(81.125,77.375)
TXD_WiFi: DD2.39 M1.11 XP4.5 | length 47.5
  Top Layer w0.25: v1(100.975,91.475) 101.475,91.475 102.291,92.291 M1.11 105.609,92.291 106.825,91.075 106.825,85.575 106.275,85.025 105.625,85.025 105.275,85.375 DD2.39
  Bottom Layer w0.5: XP4.5 78.855,94.485 82.548,94.485 84.4,92.633 84.4,91.599 84.649,91.35 88.939,91.35 89.964,92.375 93.614,92.375 94.664,91.325 100.825,91.325 v1(100.975,91.475)
VIN: FU3.1 XP2.3 XP3.3 | length 18.4
  Top Layer w1.5: FU3.1 106.2,49.675 107.531,51.006 XP2.3 106.879,52.471 105.45,53.9 105.45,59.99 XP3.3
VIN_F: C15.2 C16.2 DA1.6 R9.2 R10.2 VT1.2 | length 8.4
  Top Layer w0.5: 85.8,58.65 88.4,58.65 89.125,57.925 89.125,54.9 89.535,54.49 DA1.6
pads on no net: DD2.1 DD2.2 DD2.4 DD2.6 DD2.7 DD2.11 DD2.13 DD2.15 DD2.16 DD2.17 DD2.18 DD2.22 DD2.23 DD2.25 DD2.26 DD2.27 DD2.28 DD2.30 DD2.32 DD2.35 DD2.36 DD2.44 DD2.49 DD2.50 DD2.51 DD2.52 DD2.53 DD2.54 DD2.55 DD2.58 DD2.61 DD2.62 DD2.63 DD2.64 DD2.65 DD2.68 DD2.69 DD2.70 DD2.71 DD2.72 DD2.74 DD2.75 DD2.76 M1.3 M1.4 M1.5 M1.10 M1.14 M1.16 M1.17 REP1.1 REP2.1 VD5.2 VD6.2 XP1.1 XP1.4 XP1.6 XP2.5 XP3.5

## Polygon pours and split planes (outlines as drawn)
GND on Top Layer "GND_L01_P036" (hatched 90Degree grid 0.15 track 0.2, remove dead copper, pour order 36): 73.731,109.971 80.075,109.971 80.075,103.975 108.275,103.975 108.275,109.971 116.731,109.971 116.731,38.971 73.731,38.971
+3V3 on Top Layer "+3V3_L01_P034" (hatched 90Degree grid 0.15 track 0.2, remove dead copper, pour order 34): 110.7,89 112.275,90.575 112.275,94.55 111.75,95.075 109.875,95.075 107.2,92.4 107.2,89
+3V3 on Top Layer "+3V3_L01_P032" (hatched 90Degree grid 0.15 track 0.2, remove dead copper, pour order 32): 84.225,102.075 83.95,101.8 83.95,100.85 83.625,100.525 78.75,100.525 78.475,100.8 78.475,103.225 79.225,103.975 86.4,103.975 86.4,102.075
+3V3 on Top Layer "+3V3_L01_P030" (hatched 90Degree grid 0.15 track 0.2, remove dead copper, pour order 30): 95.325,62.425 94.825,62.925 92.85,62.925 90.55,60.625 89.175,60.625 88.5,61.3 88.5,63.725 89.725,64.95 89.725,72 90.525,72.8 95.8,72.8 96.4,72.2 96.4,71.4 96.075,71.075 92.825,71.075 92.225,70.475 92.225,67.9 93.95,66.175 101.875,66.175 103.65,64.4 103.65,62.425
NetC14_2 on Top Layer "NETC14_2_L01_P028" (hatched 90Degree grid 0.15 track 0.2, remove dead copper, pour order 28): 110.875,46.325 109.65,47.55 109.65,48.6 109.875,48.825 113.5,48.825 114.625,47.7 114.625,44.825 113.325,43.525 111.45,43.525 110.875,44.1
NetC14_2 on Top Layer "NETC14_2_L01_P024" (hatched 90Degree grid 0.15 track 0.2, remove dead copper, pour order 24): 99.975,41.5 99.025,42.45 96.25,42.45 95.85,42.05 93.525,42.05 92.85,41.375 87.975,41.375 87.25,42.1 85.475,42.1 85.2,42.375 85.2,45.5 84.725,45.975 83.125,45.975 82.75,45.6 82.75,38.975 85.996,38.975 86,38.971 104.096,38.971 104.475,39.35 104.475,40.85 103.825,41.5
NetC14_2 on Top Layer "NETC14_2_L01_P014" (hatched 90Degree grid 0.15 track 0.2, remove dead copper, pour order 14): 83.4,53 86.25,53 86.8,52.45 86.8,49.625 85.525,48.35 83.975,48.35 83.175,49.15 83.175,52.65
VIN_F on Top Layer "VIN_F_L01_P010" (hatched 90Degree grid 0.15 track 0.2, remove dead copper, pour order 10): 79.375,58.2 78.15,56.975 73.731,56.975 73.731,38.971 82.625,38.971 82.625,52.725 83.65,53.75 85.9,53.75 86.15,54 86.15,61.275 85.8,61.625 80.275,61.625 79.375,60.725
NetDA1_2 on Top Layer "NETDA1_2_L01_P020" (hatched 90Degree grid 0.15 track 0.2, remove dead copper, pour order 20): 98.85,54.2 99.1,54.45 99.1,56.275 98.75,56.625 97.325,56.625 95.15,58.8 95.15,60.225 95.35,60.425 103.425,60.425 103.95,59.9 103.95,52.2 103.05,51.3 99.725,51.3 98.85,52.175
NetDA1_1 on Top Layer "NETDA1_1_L01_P018" (hatched 90Degree grid 0.15 track 0.2, remove dead copper, pour order 18): 86.5,57.875 88.375,57.875 88.75,57.5 88.75,54.35 89.225,53.875 92.175,53.875 93.45,52.6 97.475,52.6 97.75,52.325 97.75,51.325 97.05,50.625 90.275,50.625 86.5,54.4
GND on Bottom Layer "GND_L02_P038" (hatched 90Degree grid 0.15 track 0.2, remove dead copper, pour order 38): 73.731,109.971 80.075,109.971 80.075,103.975 108.275,103.975 108.275,109.971 116.731,109.971 116.731,38.971 73.731,38.971
NetC14_2 on Bottom Layer "NETC14_2_L02_P026" (hatched 90Degree grid 0.15 track 0.2, remove dead copper, pour order 26): 98.975,38.975 98.975,41.275 105.7,48 106.975,48 107.475,48.5 113.4,48.5 114.175,47.725 114.175,45.35 113.625,44.8 105.9,44.8 102.1,41 102.1,38.971
NetC14_2 on Bottom Layer "NETC14_2_L02_P012" (hatched 90Degree grid 0.15 track 0.2, remove dead copper, pour order 12): 82.75,41.575 82.75,50.675 83.325,51.25 86.05,51.25 86.45,50.85 86.45,48.85 86.225,48.625 85.35,48.625 85,48.275 85,42 84.575,41.575

## Keep-outs
Keep-Out Layer:
  the board outline again, w0.2

## Other copper
Top Layer:
  pour cut-out: 100.625,48.5 105,48.5 105,46.375 100.625,46.375
  pour cut-out: 106.25,73.375 112.125,73.375 112.125,72 106.25,72
  pour cut-out: 95.5,62.375 103.5,62.375 103.5,60.125 95.5,60.125
Bottom Layer:
  pour cut-out: 95.5,62.375 103.5,62.375 103.5,60.125 95.5,60.125

## Silkscreen, mask and mechanical layers (free items; w line width, h text height)
Top Overlay:
  text "3V3" at 77,107.65 h1
  text "RST" at 76.975,105.25 h1
  text "IEEE" at 105.025,100.85 h1
  text "802.11 b/g/n" at 104.875,99.325 h1
  text "W_TX" at 77.025,97.3 h1
  text "W_RX" at 77.025,94.7 h1
  text "IO_0" at 77.025,92.35 h1
  text "GND" at 77.125,89.825 h1
  text "WF01" at 78.425,87.2 h2
  text "PROG" at 82.675,79.9 h1 r90
  text "RST" at 76.225,71.325 h1
  text "TST" at 86.425,70.75 h1
  text "R" at 105.025,43.1 h1
  text "G" at 110.225,39.675 h1
Mechanical 1:
  rectangle: 122.525,63.15 131.85,63.75
  rectangle: 131.475,64.9 132.875,66.025
  lines w0.002: 106.437,53.219 106.437,49.169 118.937,49.169 ; 106.437,64.319 106.437,68.369 118.937,68.369 ; 106.737,69.567 ccw(c106.737,68.567) 105.737,68.567 105.737,48.97 ccw(c106.737,48.97) 106.737,47.97 116.737,47.97 ; 116.737,48.67 106.737,48.67 cw(c106.737,48.97) 106.437,48.97 106.437,68.567 cw(c106.737,68.567) 106.737,68.867 116.737,68.867
  lines w0.1: 106.737,69.567 116.737,69.567 ; 132.875,64.95 ccw(c132.362,65.463) 132.875,65.975
  lines w0.2: 107.225,37.275 107.225,37.3 107.25,37.3 107.25,37.275 ; 129.625,63.7 129.625,65.4 130.1,65.875 131.975,65.875 ; 130,63.65 130,65.05 130.425,65.475 132.025,65.475 ; 130.325,63.675 130.325,64.725 130.65,65.05 132.075,65.05
  lines w0.5: 106.225,36.275 107.225,37.275 ; 107.225,33.875 107.225,37.3 ; 107.25,37.275 108.238,36.287
  text "Монтаж VD2" at 128.525,69.6 h1.52
  text "А" at 126.625,61.825 h1.52
  text "А" at 109.125,33.7 h5

## Dimensions
132.875,64.95 to 131.85,63.15 on Mechanical 1
132.875,64.95 to 131.85,63.75 on Mechanical 1

## Text inside footprints (layer, text, board x,y; h text height)
M1: Top Overlay "KEEP OUT POLYGON" at 86.281,104.391 h0.8; Top Overlay "AREA" at 91.806,106.741 h0.8; Top Overlay "ANTENNA" at 90.531,108.316 h0.8